# EAGLE board trabalho lip final (EAGLE 9.7.0)

Size 292.06 x 205.96 mm. Coordinates in mm from the lower left corner, seen from the top.
Outline: 0,0 292.06,0 292.06,205.96 0,205.96 0,0
Copper layers (1*16): Top 0.035mm / dielectric 1.5mm / Bottom 0.035mm
Design rules "default": minimum track width 6mil, minimum drill 0.35mm, track to track 6mil, track to pad 6mil, pad to pad 6mil, via to via 6mil, smd to smd 6mil, copper to edge 40mil, drill to drill 6mil, minimum pad ring 10mil, minimum via ring 8mil, stop-mask expansion 4mil, vias tented up to drill 0mil, thermal gap 10mil

## Footprints (pad centres in the part's own frame; a part is rotated, then mirrored left to right if it is on the bottom)
WS2812-STRIP = drill 1.016 long: 1 -3.81,0; 2 -1.27,0; 3 1.27,0; 4 3.81,0
RESAD1016W63L850D250B = drill 0.83 pad 1.43: 1 -5.08,0; 2 5.08,0
SWITCH-MOMENTARY-PTH-6.5MM = drill 1.016 pad 1.88: 1 -3.251,2.261; 2 3.251,2.261; 3 -3.251,-2.261; 4 3.251,-2.261
ARDUINO-UNO-R3-SHIELD = drill 1.016 pad 1.88: 3.3V 24.13,-2.54; 5V 24.13,0; A0 24.13,12.7; A1 24.13,15.24; A2 24.13,17.78; A3 24.13,20.32; A4 24.13,22.86; A5 24.13,25.4; AREF -24.13,-13.97; D2 -24.13,20.32; D3 -24.13,17.78; D4 -24.13,15.24; D5 -24.13,12.7; D6 -24.13,10.16; D7 -24.13,7.62; D8 -24.13,3.81; D9 -24.13,1.27; D10 -24.13,-1.27; D11 -24.13,-3.81; D12 -24.13,-6.35; D13 -24.13,-8.89; GND@0 24.13,2.54; GND@1 24.13,5.08; GND@2 -24.13,-11.43; IOREF 24.13,-7.62; NC 24.13,-10.16; RES 24.13,-5.08; RX -24.13,25.4; SCL -24.13,-19.05; SDA -24.13,-16.51; TX -24.13,22.86; VIN 24.13,7.62

## Placement (x,y rotation side)
LED1  WS2812B_STRIP  [WS2812-STRIP]  119.19,171.36 270 top
LED2  WS2812B_STRIP  [WS2812-STRIP]  283.26,160.03 90 top
LED3  WS2812B_STRIP  [WS2812-STRIP]  118.96,114.98 270 top
LED4  WS2812B_STRIP  [WS2812-STRIP]  282.68,131.01 90 top
LED5  WS2812B_STRIP  [WS2812-STRIP]  118.61,142.34 270 top
LED6  WS2812B_STRIP  [WS2812-STRIP]  283.45,102.04 90 top
LED7  WS2812B_STRIP  [WS2812-STRIP]  119.73,86.02 270 top
LED8  WS2812B_STRIP  [WS2812-STRIP]  283.8,74.68 90 top
LED9  WS2812B_STRIP  [WS2812-STRIP]  282.9,187.39 90 top
LED10  WS2812B_STRIP  [WS2812-STRIP]  118.55,197.63 270 top
R3  1k  [RESAD1016W63L850D250B]  121.15,38.67 90 top
R4  1k  [RESAD1016W63L850D250B]  136.39,38.67 90 top
R5  1k  [RESAD1016W63L850D250B]  154.17,38.67 90 top
R6  1k  [RESAD1016W63L850D250B]  174.49,38.67 90 top
S1  SWITCH_MOMENTARY  [SWITCH-MOMENTARY-PTH-6.5MM]  123.69,19.62 90 top
S2  SWITCH_MOMENTARY  [SWITCH-MOMENTARY-PTH-6.5MM]  177.03,19.62 90 top
S3  SWITCH_MOMENTARY  [SWITCH-MOMENTARY-PTH-6.5MM]  138.93,19.62 90 top
S4  SWITCH_MOMENTARY  [SWITCH-MOMENTARY-PTH-6.5MM]  156.71,19.62 90 top
U1  ARDUINO-UNO-R3-SHIELD  [ARDUINO-UNO-R3-SHIELD]  47.88,29.84 270 top

## Library data of the parts
LED1-LED10 R3-R6 S1-S4 U1 = Tinkercad

## Nets
LED1_DOUT: LED1.4 LED2.1
LED2_DOUT: LED2.4 LED5.1
LED4_DOUT: LED3.1 LED4.4
LED5_DOUT: LED4.1 LED5.4
LED6_DIN: LED3.4 LED6.1
LED6_DOUT: LED6.4 LED7.1
LED7_DOUT: LED7.4 LED8.1
LED9_DOUT: LED1.1 LED9.4
LED10_DOUT: LED9.1 LED10.4
U1_5V: LED1.2 LED2.2 LED3.2 LED4.2 LED5.2 LED6.2 LED7.2 LED8.2 LED9.2 LED10.2 S1.3 S1.4 S2.3 S2.4 S3.3 S3.4 S4.3 S4.4 U1.5V
U1_D3: R3.1 S1.1 S1.2 U1.D3
U1_D4: R4.1 S3.1 S3.2 U1.D4
U1_D5: R5.1 S4.1 S4.2 U1.D5
U1_D6: R6.1 S2.1 S2.2 U1.D6
U1_D13: LED10.1 U1.D13
U1_GND: LED1.3 LED2.3 LED3.3 LED4.3 LED5.3 LED6.3 LED7.3 LED8.3 LED9.3 LED10.3 R3.2 R4.2 R5.2 R6.2 U1.GND@0 U1.GND@1 U1.GND@2

## Tracks (layer width: path | path; a pad name or v marks a point on that pad's centre or on a via)
LED1_DOUT  (1 unrouted)
LED2_DOUT  (1 unrouted)
LED4_DOUT  (1 unrouted)
LED5_DOUT  (1 unrouted)
LED6_DIN  (1 unrouted)
LED6_DOUT  (1 unrouted)
LED7_DOUT  (1 unrouted)
LED9_DOUT  (1 unrouted)
LED10_DOUT  (1 unrouted)
U1_5V  (18 unrouted)
U1_D3  (3 unrouted)
U1_D4  (3 unrouted)
U1_D5  (3 unrouted)
U1_D6  (3 unrouted)
U1_D13  (1 unrouted)
U1_GND  (16 unrouted)